# EAGLE board Power+noise (EAGLE 6.5.0)
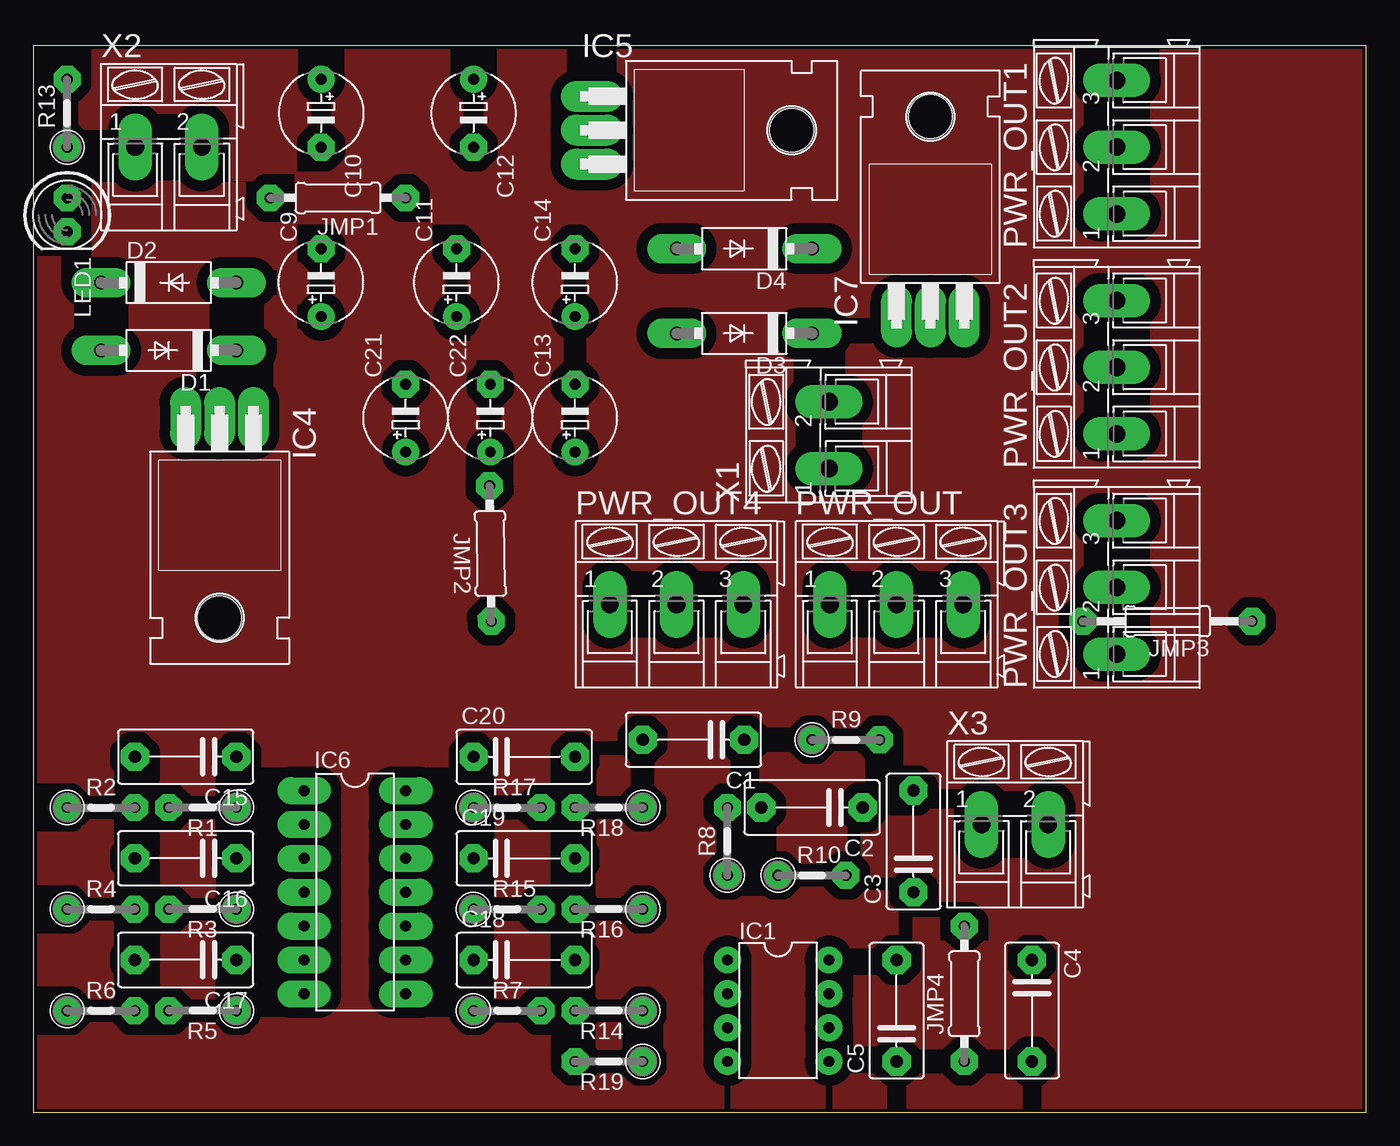
[diagram p0: board, top side]
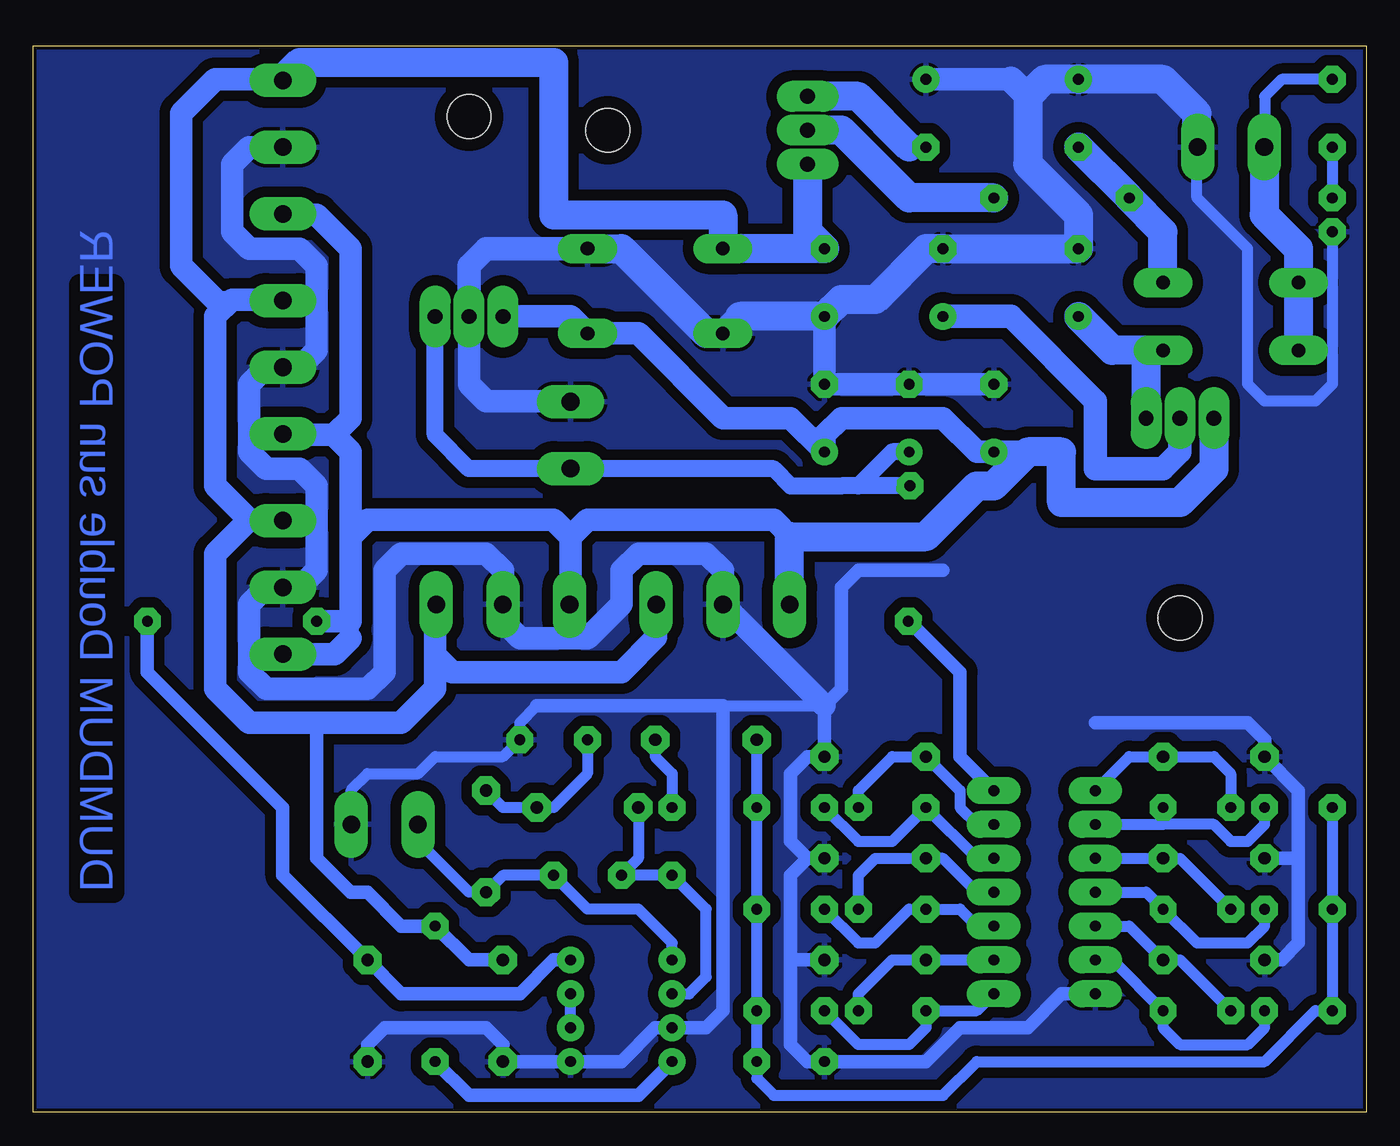
[diagram p1: board, bottom side, seen from below]

Size 100 x 80 mm. Coordinates in mm from the lower left corner, seen from the top.
Outline: 0,0 100,0 100,80 0,80 0,0
Copper layers (1*16): Top 0.035mm / dielectric 1.5mm / Bottom 0.035mm
Design rules "hobby-desingrules": minimum track width 0.8mm, minimum drill 0.8mm, track to track 0.8mm, track to pad 0.8mm, pad to pad 0.45mm, via to via 0.8mm, smd to smd 8mil, copper to edge 10mil, drill to drill 8mil, minimum pad ring 0.6mm, minimum via ring 0.6mm, stop-mask expansion 0mil, vias tented up to drill 0mil, thermal gap 10mil

## Footprints (pad centres in the part's own frame; a part is rotated, then mirrored left to right if it is on the bottom)
C075-042X103 = drill 0.914 octagon: 1 -3.81,0; 2 3.81,0
E5-6 = drill 0.813 pad 1.905: + -2.54,0 | drill 0.813 pad 1.905 octagon: - 2.54,0
F126-10 = drill 1.016 long: A 5.08,0; C -5.08,0
DIL08 = drill 0.813 pad 1.27: 1 -3.81,-3.81; 2 -1.27,-3.81; 3 1.27,-3.81; 4 3.81,-3.81; 5 3.81,3.81; 6 1.27,3.81; 7 -1.27,3.81; 8 -3.81,3.81
TO220H = drill 1.118 long: 1 -2.54,-10.16; 2 0,-10.16; 3 2.54,-10.16 | hole 3.302: 0,4.826
DIL14 = drill 0.813 long: 1 -7.62,-3.81; 2 -5.08,-3.81; 3 -2.54,-3.81; 4 0,-3.81; 5 2.54,-3.81; 6 5.08,-3.81; 7 7.62,-3.81; 8 7.62,3.81; 9 5.08,3.81; 10 2.54,3.81; 11 0,3.81; 12 -2.54,3.81; 13 -5.08,3.81; 14 -7.62,3.81
0207/10 = drill 0.813 octagon: 1 -5.08,0; 2 5.08,0
0207/12 = drill 0.813 octagon: 1 -6.35,0; 2 6.35,0
LED5MM = drill 0.813 octagon: A -1.27,0; K 1.27,0
AK300/3 = drill 1.321 long: 1 -5.004,0; 2 0,0; 3 5.004,0
0207/5V = drill 0.813 octagon: 1 -2.54,0; 2 2.54,0
AK300/2 = drill 1.321 long: 1 -2.515,0; 2 2.489,0

## Placement (x,y rotation side)
C1  1n  [C075-042X103]  49.53,27.94 180 top
C2  3.3n  [C075-042X103]  58.42,22.86 180 top
C3  3.3n  [C075-042X103]  66.04,20.32 90 top
C4  0.1u  [C075-042X103]  74.93,7.62 270 top
C5  0.1u  [C075-042X103]  64.77,7.62 90 top
C9  470u  [E5-6]  21.59,62.23 90 top
C10  470u  [E5-6]  21.59,74.93 270 top
C11  25u  [E5-6]  31.75,62.23 90 top
C12  25u  [E5-6]  33.02,74.93 270 top
C13  1u  [E5-6]  40.64,52.07 90 top
C14  1u  [E5-6]  40.64,62.23 90 top
C15  22n  [C075-042X103]  11.43,26.67 180 top
C16  19n  [C075-042X103]  11.43,19.05 180 top
C17  19n  [C075-042X103]  11.43,11.43 180 top
C18  10n  [C075-042X103]  36.83,11.43 0 top
C19  10n  [C075-042X103]  36.83,19.05 0 top
C20  19n  [C075-042X103]  36.83,26.67 0 top
C21  1u  [E5-6]  27.94,52.07 90 top
C22  1u  [E5-6]  34.29,52.07 90 top
D1  BYT01  [F126-10]  10.16,57.15 180 top
D2  BYT01  [F126-10]  10.16,62.23 0 top
D3  BYT01  [F126-10]  53.34,58.42 180 top
D4  BYT01  [F126-10]  53.34,64.77 180 top
IC1  TL072P  [DIL08]  55.88,7.62 270 top
IC4  7815T  [TO220H]  13.97,41.91 180 top
IC5  [TO220H]  52.07,73.66 270 top
IC6  4584N  [DIL14]  24.13,16.51 270 top
IC7  7805T  [TO220H]  67.31,69.85 0 top
JMP1  0  [0207/10]  22.86,68.58 180 top
JMP2  0  [0207/10]  34.29,41.91 90.8 top
JMP3  0  [0207/12]  85.09,36.83 180 top
JMP4  0  [0207/10]  69.85,8.89 90 top
LED1  [LED5MM]  2.54,67.31 270 top
PWR_OUT  +15V, GND, -15V  [AK300/3]  64.77,38.1 0 top
PWR_OUT1  +15V, GND, -15V  [AK300/3]  81.28,72.39 90 top
PWR_OUT2  +15V, GND, -15V  [AK300/3]  81.28,55.88 90 top
PWR_OUT3  +15V, GND, -15V  [AK300/3]  81.28,39.37 90 top
PWR_OUT4  +15V, GND, -15V  [AK300/3]  48.26,38.1 0 top
R1  300k  [0207/5V]  12.7,22.86 180 top
R2  120k  [0207/5V]  5.08,22.86 0 top
R3  270k  [0207/5V]  12.7,15.24 180 top
R4  120k  [0207/5V]  5.08,15.24 0 top
R5  220k  [0207/5V]  12.7,7.62 180 top
R6  120k  [0207/5V]  5.08,7.62 0 top
R7  680k  [0207/5V]  35.56,7.62 0 top
R8  22k  [0207/5V]  52.07,20.32 90 top
R9  580  [0207/5V]  60.96,27.94 0 top
R10  82k  [0207/5V]  58.42,17.78 0 top
R13  1.2k  [0207/5V]  2.54,74.93 90 top
R14  120k  [0207/5V]  43.18,7.62 180 top
R15  560k  [0207/5V]  35.56,15.24 0 top
R16  120k  [0207/5V]  43.18,15.24 180 top
R17  560  [0207/5V]  35.56,22.86 0 top
R18  120k  [0207/5V]  43.18,22.86 180 top
R19  120k  [0207/5V]  43.18,3.81 180 top
X1  5 VDC  [AK300/2]  59.69,50.8 90 top
X2  15 VAC  [AK300/2]  10.16,72.39 0 top
X3  NOISE_OUT  [AK300/2]  73.66,21.59 0 top

## Library data of the parts
C1-C5 C9-C22 JMP1-JMP4 R1-R10 R13-R19 = rcl
D1-D4 = diode
IC1 IC4 IC5 IC7 = linear
IC6 = 45xx
LED1 = led
PWR_OUT PWR_OUT1-PWR_OUT4 X1-X3 = con-ptr500; OC_FARNELL: unknown; OC_NEWARK: unknown

## Nets
+5V: C22.+ IC7.3 JMP2.2 X1.1
+15V: C13.+ C21.+ D3.C IC4.3 IC7.1 JMP3.2 PWR_OUT1.1 PWR_OUT2.1 PWR_OUT3.1 PWR_OUT4.1 PWR_OUT.1
-15V: C5.2 C14.- D4.A IC5.3 JMP4.2 PWR_OUT1.3 PWR_OUT2.3 PWR_OUT3.3 PWR_OUT4.3 PWR_OUT.3
GND: C4.2 C5.1 C9.- C10.+ C11.- C12.+ C13.- C14.+ C15.2 C16.2 C17.2 C18.2 C19.2 C20.2 C21.- C22.- D3.A D4.C IC1.3 IC1.5 IC6.7 IC7.2 LED1.K PWR_OUT1.2 PWR_OUT2.2 PWR_OUT3.2 PWR_OUT4.2 PWR_OUT.2 R9.2 R19.2 X1.2 X2.2 X3.2
N$1: C1.2 R2.1 R4.1 R6.1 R14.1 R16.1 R18.1 R19.1
N$2: IC6.12 R17.1 R18.2
N$3: IC6.10 R15.1 R16.2
N$4: IC6.8 R7.1 R14.2
N$5: IC6.6 R5.1 R6.2
N$6: IC6.4 R3.1 R4.2
N$7: IC6.2 R1.1 R2.2
N$8: C20.1 IC6.13 R17.2
N$9: C19.1 IC6.11 R15.2
N$10: C10.- D2.A JMP1.2
N$11: C1.1 R8.2
N$12: C2.2 IC1.2 R8.1 R10.1
N$13: C3.1 IC1.1 R10.2 X3.1
N$14: C2.1 C3.2 R9.1
N$15: C18.1 IC6.9 R7.2
N$16: C17.1 IC6.5 R5.2
N$17: C16.1 IC6.3 R3.2
N$18: C15.1 IC6.1 R1.2
N$19: D1.A D2.C R13.2 X2.1
N$20: LED1.A R13.1
N$21: IC1.6 IC1.7
N$22: C9.+ D1.C IC4.1
N$23: IC5.2 JMP1.1
N$24: C11.+ IC4.2
N$25: IC6.14 JMP2.1
N$26: C12.- IC5.1
N$27: IC1.4 JMP4.1
N$28: C4.1 IC1.8 JMP3.1

## Tracks (layer width: path | path; a pad name or v marks a point on that pad's centre or on a via)
+5V
  Bottom 1.27: C22.+ 35.56,49.53 38.1,46.99 39.37,46.99 | JMP2.2 39.37,46.99 | 39.37,46.99 | 39.37,46.99 43.18,46.99 44.45,48.26 59.72,48.26 | 60.96,48.26 59.72,48.26 | 59.72,48.26 X1.1 67.33,48.28 69.85,50.8 IC7.3
+15V
  Bottom 1.27: 59.69,38.02 PWR_OUT.1 | 81.36,50.8 PWR_OUT2.1 81.2,50.8 | 81.36,67.31 PWR_OUT1.1 | 76.2,35.56 76.2,36.83 | 43.26,43.1 43.18,43.18
  Bottom 1.676: IC7.1 59.69,59.69 D3.C 54.61,58.42 48.26,52.07 43.18,52.07 C13.+ 40.64,50.8 39.37,52.07 31.75,52.07 29.21,49.53 C21.+ 25.4,49.53 | 81.36,67.31 78.74,67.31 76.2,64.77 76.2,52.07 77.47,50.8 | 77.47,50.8 81.2,50.8 | PWR_OUT3.1 77.39,34.37 76.2,35.56 | 76.2,43.18 76.2,36.83 JMP3.2 | 76.2,43.18 76.2,49.53 77.47,50.8 | 59.69,38.02 59.69,43.18 | 59.69,43.18 60.96,44.45 74.93,44.45 76.2,43.18 | 59.69,43.18 58.42,44.45 44.45,44.45 43.18,43.18
  Bottom 2.184: PWR_OUT4.1 43.26,43.1 | 43.18,43.18 33.02,43.18 29.21,46.99 27.94,46.99 25.4,49.53 22.86,49.53 22.86,45.72 13.97,45.72 11.43,48.26 IC4.3
-15V
  Bottom 1.016: C5.2 67.31,11.43 JMP4.2 72.39,13.97 74.93,16.51 76.2,16.51 78.74,19.05 78.74,29.21
  Bottom 1.27: 81.28,77.47 PWR_OUT1.3 | 69.85,38.1 69.85,38.18 PWR_OUT.3 69.85,38.02 | PWR_OUT3.3 81.2,44.45 83.82,44.45 83.74,44.37 | 81.2,60.96 PWR_OUT2.3 | 85.09,60.96 86.36,60.96
  Bottom 1.676: 81.2,60.96 85.09,60.96 86.36,59.69 86.36,46.99 83.82,44.45 86.36,41.91 86.36,31.75 83.82,29.21 78.74,29.21 72.39,29.21 69.85,31.75 69.85,34.29 | 86.36,60.96 88.9,63.5 88.9,74.93 86.36,77.47 81.36,77.47 | PWR_OUT3.3 83.74,44.37 | 69.85,34.29 69.85,38.02 | PWR_OUT4.3 53.26,35.64 55.88,33.02 68.58,33.02 69.85,34.29
  Bottom 2.184: IC5.3 41.91,66.04 C14.- D4.A 48.26,67.31 60.96,67.31 60.96,78.74 80.01,78.74 81.28,77.47 | 81.36,77.47 PWR_OUT1.3
GND
  Bottom 0.813: 12.7,72.34 12.7,68.58 8.89,64.77 8.89,54.61 7.62,53.34 3.81,53.34 2.54,54.61 LED1.K | 48.26,30.48 40.64,30.48 | 62.23,30.48 63.5,29.21 R9.2 64.77,26.67 69.85,26.67 71.12,25.4 74.93,25.4 76.15,24.18 X3.2 | 64.77,5.08 C5.1
  Bottom 1.016: 41.91,19.05 43.18,20.32 43.18,25.4 41.91,26.67 C20.2 40.64,30.48 39.37,31.75 39.37,39.37 38.1,40.64 31.75,40.64 | 41.91,19.05 C19.2 | 43.18,11.43 43.18,17.78 41.91,19.05 | C18.2 43.18,11.43 | 5.08,19.05 5.08,24.13 C15.2 7.62,27.94 8.89,29.21 20.32,29.21 | 5.08,19.05 5.08,12.7 6.35,11.43 C17.2 | C16.2 5.08,19.05 | IC6.7 22.86,8.89 25.4,6.35 30.48,6.35 33.02,3.81 R19.2 41.91,3.81 43.18,5.08 43.18,11.43 | 62.23,30.48 48.26,30.48 48.26,7.62 49.53,6.35 IC1.3 53.34,6.35 55.88,3.81 IC1.5 C5.1 | C4.2 74.93,5.08 73.66,6.35 66.04,6.35 64.77,5.08
  Bottom 1.27: 82.55,55.88 PWR_OUT2.2 | 80.01,39.37 PWR_OUT3.2 | 59.74,53.34 X1.2
  Bottom 1.676: C14.+ C13.- C22.- C21.- | PWR_OUT2.2 80.01,55.88 78.74,57.15 78.74,63.5 80.01,64.77 83.82,64.77 85.09,66.04 85.09,71.12 83.82,72.39 PWR_OUT1.2 | 82.55,55.88 83.82,54.61 83.82,49.53 82.55,48.26 80.01,48.26 78.74,46.99 78.74,40.64 80.01,39.37 | PWR_OUT3.2 82.55,39.37 83.82,38.1 83.82,33.02 82.55,31.75 74.93,31.75 73.66,33.02 73.66,40.64 72.39,41.91 66.04,41.91 64.77,40.64 PWR_OUT.2 64.77,36.83 63.5,35.56 58.42,35.56 55.88,38.1 55.88,40.64 54.61,41.91 49.53,41.91 48.26,40.64 PWR_OUT4.2 40.64,30.48 | IC7.2 67.31,54.61 66.04,53.34 59.74,53.34 | 26.67,77.47 C12.+
  Bottom 1.778: D4.C 66.04,64.77 67.31,63.5 IC7.2
  Bottom 1.93: 12.7,72.34 X2.2 | 26.67,77.47 25.4,76.2 | 46.99,59.69 D3.A
  Bottom 2.184: 12.7,72.34 12.7,74.93 15.24,77.47 C10.+ 24.13,77.47 25.4,76.2 25.4,71.12 21.59,67.31 C9.- C11.- 33.02,64.77 36.83,60.96 39.37,60.96 C14.+ 46.99,59.69 | D4.C 55.88,64.77 49.53,58.42 D3.A
  pour Bottom: 0,80.01 100.33,80.01 100.33,0 0,0
N$1
  Bottom 0.813: R2.1 R4.1 R6.1 3.81,7.62 7.62,3.81 29.21,3.81 31.75,1.27 44.45,1.27 45.72,2.54 R19.1 R14.1 R16.1 R18.1 C1.2
N$2
  Bottom 0.813: IC6.12 29.21,19.05 R17.1 35.56,20.32 38.1,20.32 R18.2
N$3
  Bottom 0.813: IC6.10 29.21,13.97 30.48,15.24 R15.1 34.29,15.24 36.83,12.7 38.1,12.7 R16.2
N$4
  Bottom 0.813: IC6.8 29.21,7.62 R7.1 33.02,6.35 34.29,5.08 38.1,5.08 R14.2
N$5
  Bottom 0.813: IC6.6 19.05,11.43 R5.1 15.24,6.35 13.97,5.08 8.89,5.08 7.62,6.35 R6.2
N$6
  Bottom 0.813: IC6.4 16.51,16.51 R3.1 12.7,12.7 8.89,12.7 7.62,13.97 R4.2
N$7
  Bottom 0.813: IC6.2 15.24,21.59 | R2.2 7.62,21.59 8.89,20.32 10.16,20.32 11.43,21.59 15.24,21.59 | 15.24,21.59 R1.1
N$8
  Bottom 0.813: R17.2 38.1,24.13 35.56,26.67 C20.1 30.48,24.13 30.48,22.86 29.21,21.59 IC6.13
N$9
  Bottom 0.813: R15.2 38.1,17.78 36.83,19.05 C19.1 31.75,19.05 29.21,16.51 IC6.11
N$10
  Bottom 2.184: C10.- JMP1.2 15.24,66.04 D2.A
N$11
  Bottom 0.813: C1.1 53.34,26.67 52.07,25.4 R8.2
N$12
  Bottom 0.813: C2.2 54.61,19.05 R10.1 R8.1 49.53,15.24 49.53,10.16 50.8,8.89 IC1.2
N$13
  Bottom 0.813: IC1.1 52.07,12.7 54.61,15.24 58.42,15.24 R10.2 64.77,17.78 C3.1 67.31,16.51 71.12,20.32 71.12,21.57 X3.1
N$14
  Bottom 0.813: C3.2 64.77,22.86 C2.1 60.96,22.86 58.42,25.4 R9.1
N$15
  Bottom 0.813: R7.2 38.1,8.89 35.56,11.43 C18.1 IC6.9
N$16
  Bottom 0.813: IC6.5 17.78,13.97 C17.1 13.97,11.43 R5.2
N$17
  Bottom 0.813: IC6.3 C16.1 13.97,19.05 R3.2
N$18
  Bottom 0.813: IC6.1 17.78,26.67 C15.1 11.43,26.67 10.16,25.4 R1.2
N$19
  Bottom 0.813: R13.2 6.35,77.47 7.62,76.2 7.62,72.42 X2.1
  Bottom 2.184: X2.1 7.64,67.33 5.08,64.77 D2.C D1.A
N$20
  Bottom 0.813: R13.1 LED1.A
N$21
  Bottom 0.813: IC1.6 IC1.7
N$22
  Bottom 1.676: D1.C 16.51,57.15
  Bottom 2.184: C9.+ 19.05,57.15 16.51,57.15 IC4.1
N$23
  Bottom 2.184: JMP1.1 34.29,68.58 39.37,73.66 IC5.2
N$24
  Bottom 1.778: C11.+ 26.67,59.69 20.32,53.34 20.32,48.26 15.24,48.26 13.97,49.53 IC4.2
N$25
  Bottom 0.813: 34.29,36.83 JMP2.1
  Bottom 1.016: IC6.14 30.48,26.67 30.48,33.02 34.29,36.83
N$26
  Bottom 1.676: C12.- 34.29,72.39
  Bottom 2.184: 34.29,72.39 38.1,76.2 IC5.1
N$27
  Bottom 1.016: JMP4.1 67.31,1.27 54.61,1.27 IC1.4
N$28
  Bottom 1.016: IC1.8 60.96,11.43 63.5,8.89 72.39,8.89 C4.1 81.28,17.78 81.28,22.86 91.44,33.02 JMP3.1
N$29
  pour Top: 0,80.01 0,0 99.06,0 99.06,1.27 99.06,80.01

## Text on the board
Bottom: DUMDUM Double sun POWER